# Altium PCB Copy of pcb_solder.PcbDoc (part 1 of 2)
Units mil, origin at the board's own origin, x right, y up, seen from the top; angles counter-clockwise.
Board outline 15000 x 4842.5 mil, 2 copper layers (F.Cu, B.Cu); 212 components, 120 nets, 804 pads, 0 vias.
Unrouted connection lines stored in the file: 258.
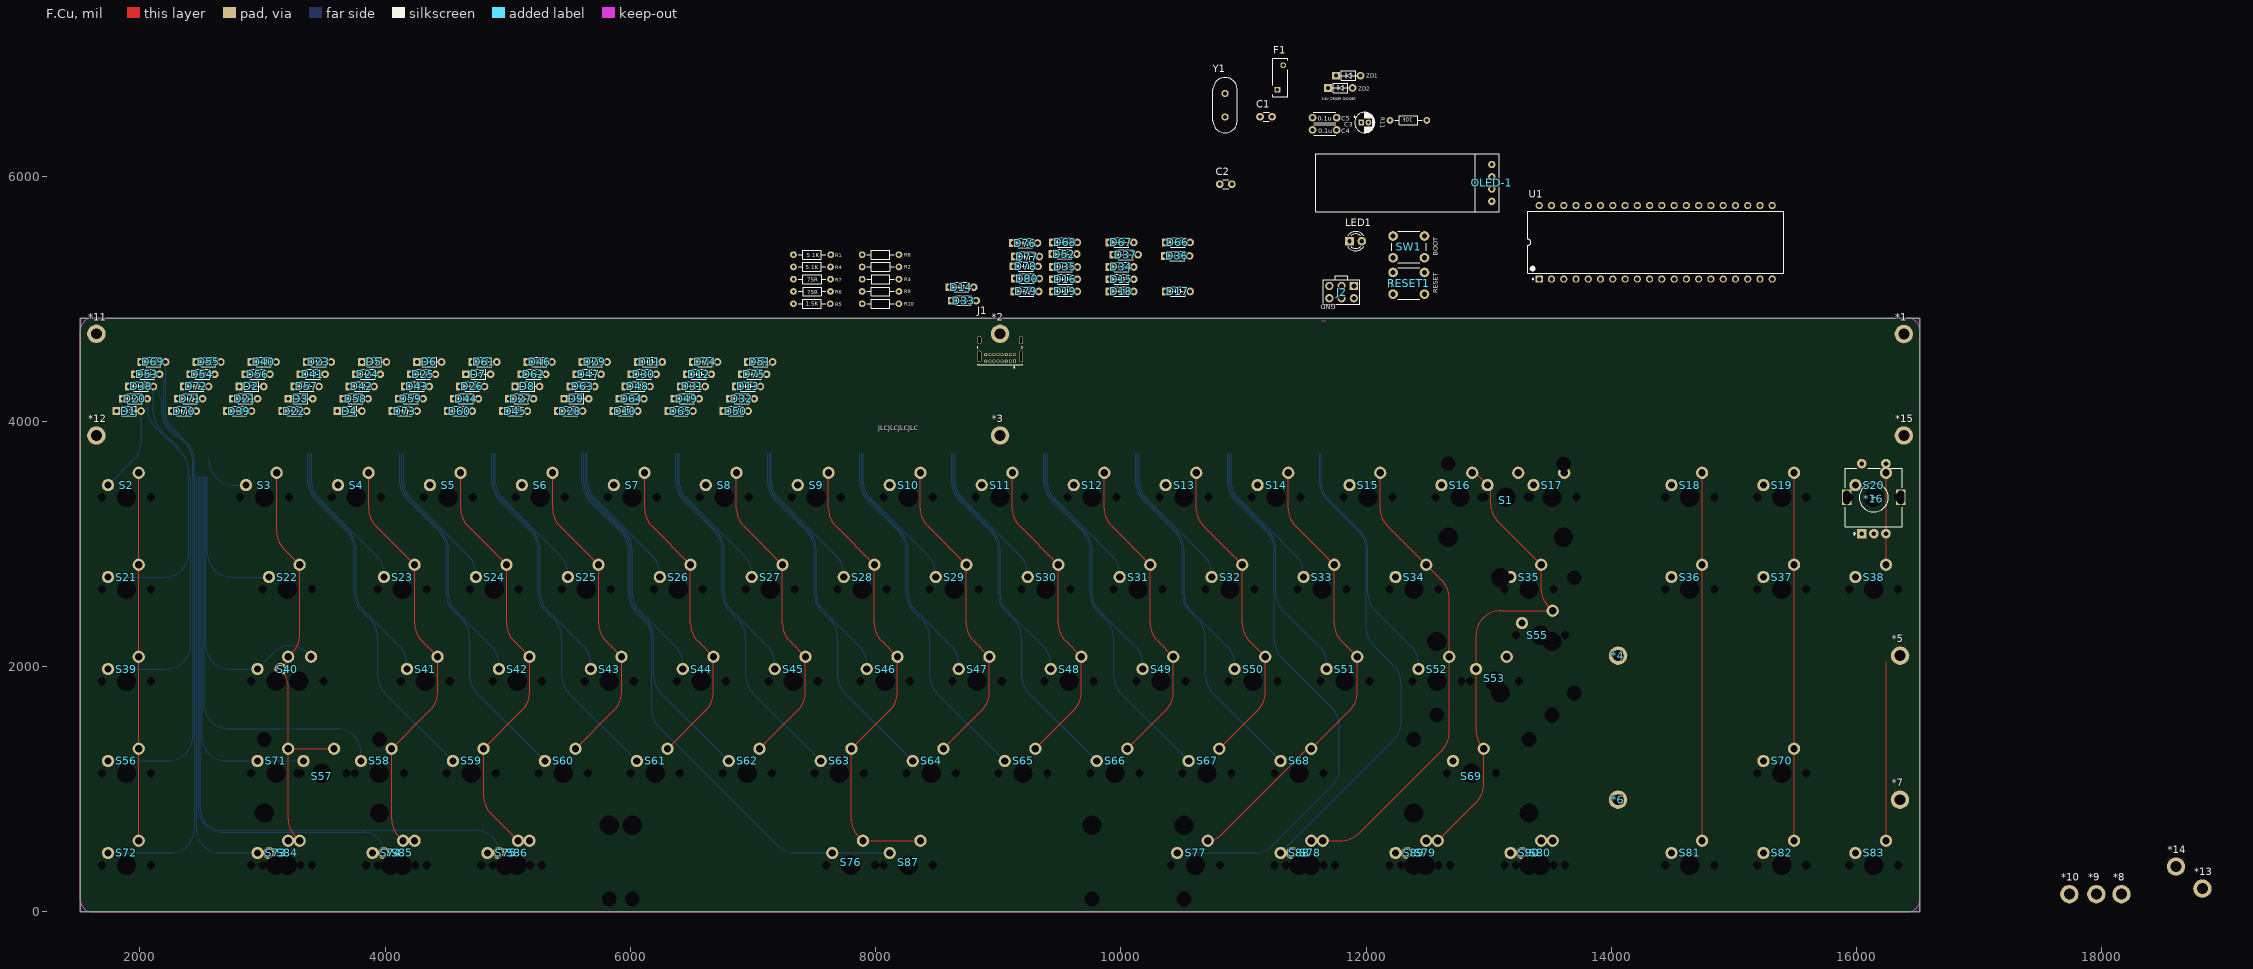
[diagram p0: F.Cu view]
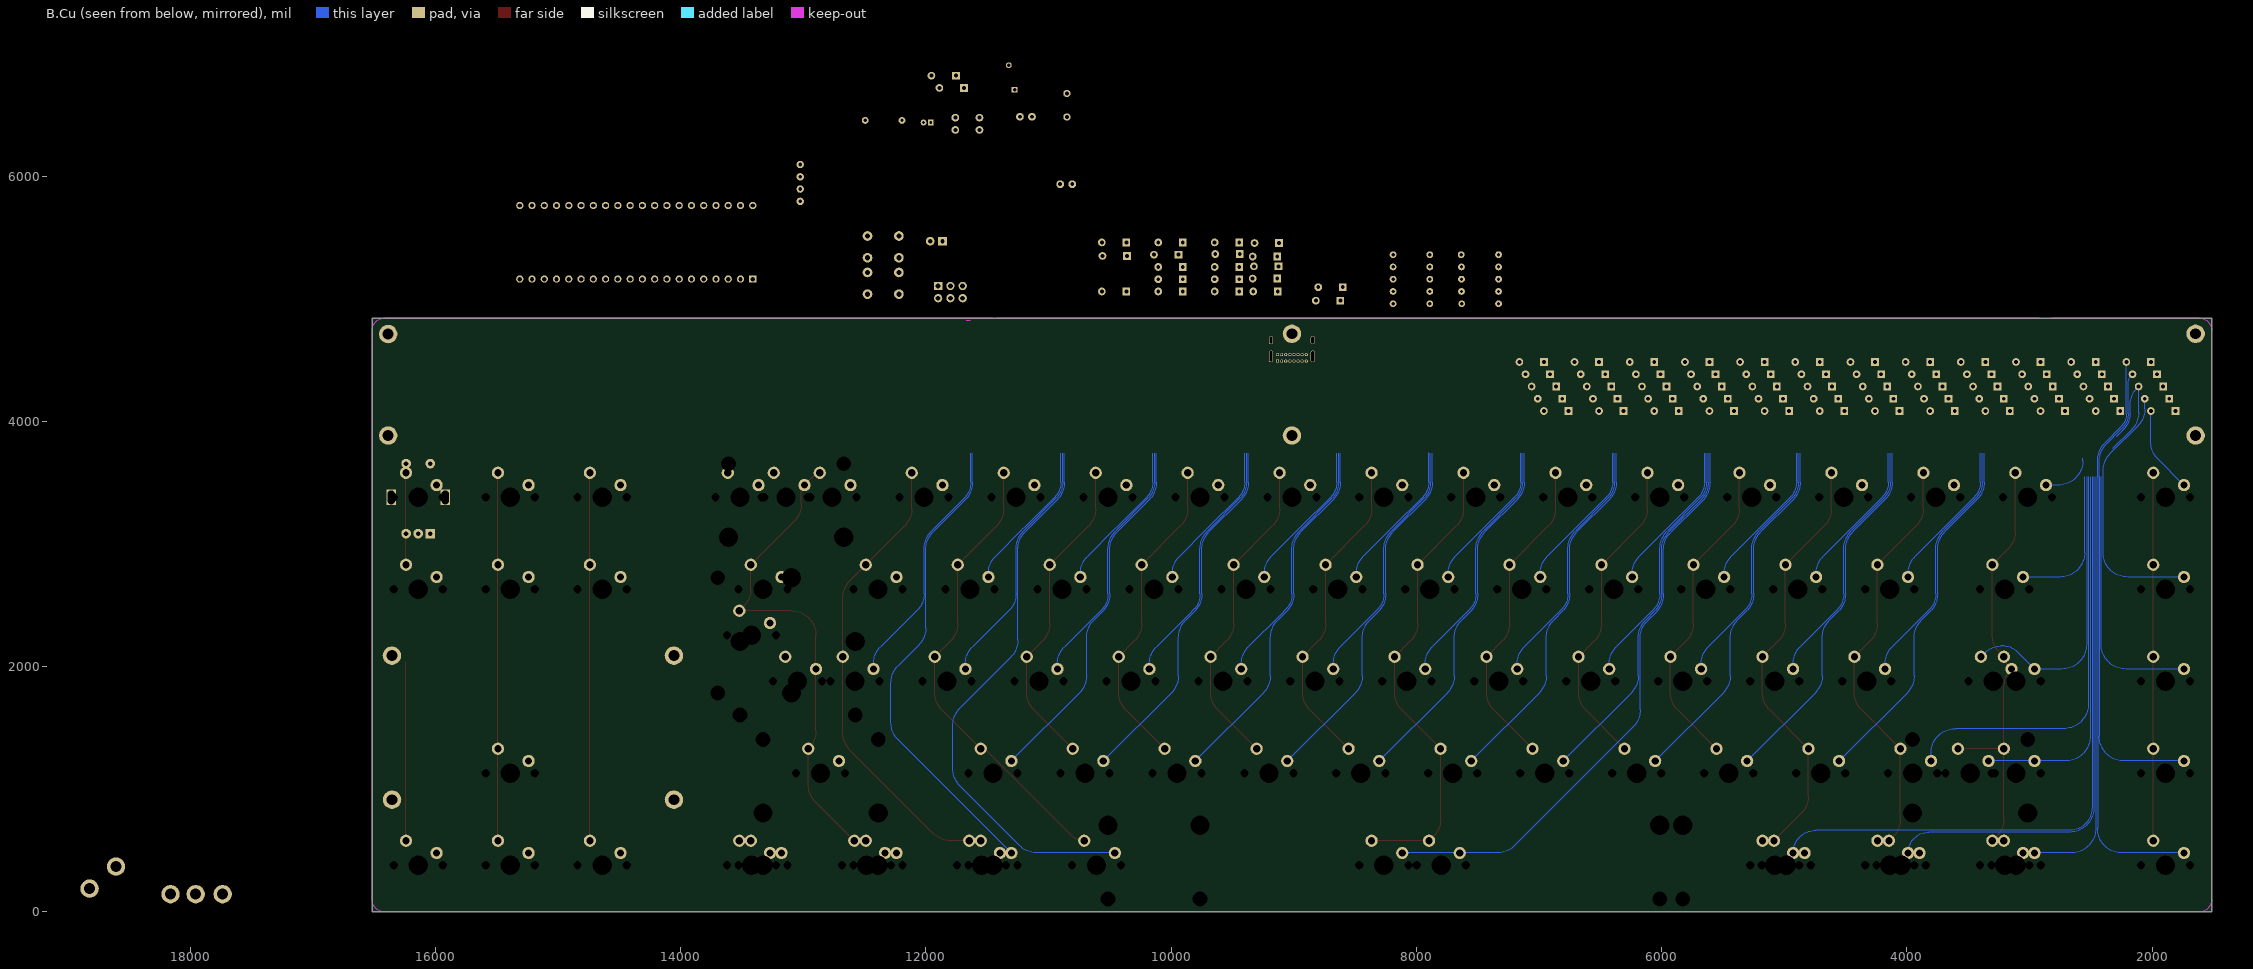
[diagram p1: B.Cu view, seen from below]

## Layer stack, top to bottom
F.Mask: solder mask 0.4, Solder Resist, Dk 3.5
F.Cu: signal copper 1.4
Dielectric 1: dielectric 12.6, FR-4, Dk 4.8
B.Cu: signal copper 1.4
B.Mask: solder mask 0.4, Solder Resist, Dk 3.5

## Board outline
16515,0 16515,3795 16515,3965 16515,4842.5 11455,4842.5 11425,4842.5 8175,4842.5 5407.5,4842.5 2820,4842.5 1515,4842.5 1515,3812.5 1515,0 2450,0 13975,0

## Design rules (kind name [scope] priority, off if disabled: settings)
BoardOutlineClearance [All] p1: gap=7.87 ignorepadtopadclearanceinfootprint=FALSE
Clearance [All] p1: gap=5 ignorepadtopadclearanceinfootprint=FALSE except(7.8: Arc-Hole Track-Hole; 9.84: SMDPad-Hole THPad-Hole Via-Hole Fill-Hole Poly-Hole Region-Hole Text-Hole)
ComponentClearance [All] p1: gap=5 collisioncheckmode=3 verticalgap=5 showdistances=TRUE
DiffPairsRouting [All] p1: maxlimit=10 minlimit=5 mostfreqgap=5 toplayer_minwidth=5 toplayer_maxwidth=1000 toplayer_prefwidth=5 bottomlayer_minwidth=5 bottomlayer_maxwidth=1000 bottomlayer_prefwidth=5 maxuncoupledlength=500
Height [All] p1: minheight=0 maxheight=71497.94 prefheight=500
HoleSize [All] p1: absolutevalues=TRUE maxlimit=248.03 minlimit=11.81 maxpercent=80.000 minpercent=20.000
HoleToHoleClearance [All] p1: gap=9.84 allowstackedmicrovias=FALSE
MinimumAnnularRing [All] p1: minimumring=3
MinimumSolderMaskSliver [All] p1: minsoldermaskwidth=0
PlaneClearance [All] p1: clearance=5
PlaneConnect PlaneConnectPowerPads [InPadClass('PowerPads')] p1: planeconnectstyle=Direct reliefexpansion=20 reliefentries=4 reliefconductorwidth=10 reliefairgap=10
PlaneConnect [All] p2: pad.planeconnectstyle=Relief pad.reliefexpansion=11.81 pad.reliefentries=4 pad.reliefconductorwidth=5 pad.reliefairgap=5 via.planeconnectstyle=Direct via.reliefexpansion=11.81 via.reliefentries=4 via.reliefconductorwidth=5 via.reliefairgap=5
PolygonConnect PolygonConnectPowerPads [All vs (InPadClass('PowerPads'))] p1: connectstyle=Direct reliefconductorwidth=10 reliefentries=4 polygonreliefangle="90 Angle" airgapwidth=10
PolygonConnect [All] p2: thpad.connectstyle=Relief thpad.reliefconductorwidth=5 thpad.reliefentries=4 thpad.polygonreliefangle="90 Angle" thpad.airgapwidth=5 smdpad.connectstyle=Relief smdpad.reliefconductorwidth=5 smdpad.reliefentries=4 smdpad.polygonreliefangle="90 Angle" smdpad.airgapwidth=5 via.connectstyle=Direct via.reliefconductorwidth=5 via.reliefentries=4 via.polygonreliefangle="90 Angle" via.airgapwidth=5
RoomDefinition sch_solder [InComponentClass('sch_solder')] p1: confinementstyle=ConfineIn formatcopy=TRUE lockcomponents=FALSE outline 16560,60 19990,60 19990,2270 16560,2270
RoutingCorners [All] p1: cornerstyle=Round minsetback=1000 maxsetback=1000
RoutingVias [All] p1: holewidth=11.81 width=23.62 viastyle="Through Hole" minholewidth=11.81 minwidth=23.62 maxholewidth=23.62 maxwidth=259.84
SilkToSilkClearance [All] p1: silktosilkclearance=0
SilkToSolderMaskClearance [IsPad] p1: minsilkscreentomaskgap=5 clearancetoexposedcopper=TRUE
SolderMaskExpansion [All] p1: expansion=2.95 istentingtop=FALSE
Width [All] p1: maxlimit=15 minlimit=5 preferedwidth=10 minimp=50.000000 maximp=50.000000 favimp=50.000000
19 further rules are at their usual default settings.

## Components (designator, comment, footprint, x,y, rotation, side; value= is the part's Value field where it differs from the comment)
*1 "Component_1" M2_Mounting_hole#1 16385,4712.5 r0 top
*2 "Component_1" M2_Mounting_hole#2 7415,4715 r0 top
*3 "Component_1" M2_Mounting_hole#2 7415,3885 r0 top
*4 "Component_1" M2_Mounting_hole#1 14055,2090 r0 top
*5 "Component_1" M2_Mounting_hole#1 16355,2090 r0 top
*6 "Component_1" M2_Mounting_hole#1 14055,915 r0 top
*7 "Component_1" M2_Mounting_hole#1 16353.5,915 r0 top
*8 "Component_1" M2_Mounting_hole#1 18160,145 r0 top
*9 "Component_1" M2_Mounting_hole#1 17955,145 r0 top
*10 "Component_1" M2_Mounting_hole#1 17735,145 r0 top
*11 "Component_1" M2_Mounting_hole#1 1645,4715 r0 top
*12 "Component_1" M2_Mounting_hole#1 1645,3885 r0 top
*13 "Component_1" M2_Mounting_hole#3 20420,190 r0 top
*14 "Component_1" M2_Mounting_hole#3 20205,370 r0 top
*15 "Component_1" M2_Mounting_hole#1 16385,3885 r0 top
*16 "Rotary_Encoder_Switch" RotaryEncoder_Alps_EC11E-Switch_Vertical_H20mm 16042.05,3084.72 r90 top
C1 "22p" C_Disc_D3.0mm_W1.6mm_P2.50mm 11135,6485 r0 top
C2 "22p" C_Disc_D3.0mm_W1.6mm_P2.50mm 10806.57,5935 r0 top
C3 "4.7u" CP_Radial_D4.0mm_P1.50mm 11960,6437.5 r0 top
C4 "0.1u" C_Disc_D4.3mm_W1.9mm_P5.00mm 11760,6377.5 r180 top
C5 "0.1u" C_Disc_D4.3mm_W1.9mm_P5.00mm 11760,6477.5 r180 top
D1 "D_Small" D_DO-35_SOD27_P5.08mm_Horizontal 1760,4085 r0 top
D2 "D_Small" D_DO-35_SOD27_P5.08mm_Horizontal 2760,4285 r0 top
D3 "D_Small" D_DO-35_SOD27_P5.08mm_Horizontal 3160,4185 r0 top
D4 "D_Small" D_DO-35_SOD27_P5.08mm_Horizontal 3560,4085 r0 top
D5 "D_Small" D_DO-35_SOD27_P5.08mm_Horizontal 3760,4485 r0 top
D6 "D_Small" D_DO-35_SOD27_P5.08mm_Horizontal 4210,4485 r0 top
D7 "D_Small" D_DO-35_SOD27_P5.08mm_Horizontal 4610,4385 r0 top
D8 "D_Small" D_DO-35_SOD27_P5.08mm_Horizontal 5010,4285 r0 top
D9 "D_Small" D_DO-35_SOD27_P5.08mm_Horizontal 5410,4185 r0 top
D10 "D_Small" D_DO-35_SOD27_P5.08mm_Horizontal 5810,4085 r0 top
D11 "D_Small" D_DO-35_SOD27_P5.08mm_Horizontal 6010,4485 r0 top
D12 "D_Small" D_DO-35_SOD27_P5.08mm_Horizontal 6410,4385 r0 top
D13 "D_Small" D_DO-35_SOD27_P5.08mm_Horizontal 6810,4285 r0 top
D14 "D_Small" D_DO-35_SOD27_P5.08mm_Horizontal 8550,5095 r0 top
D15 "D_Small" D_DO-35_SOD27_P5.08mm_Horizontal 9855,5160 r0 top
D16 "D_Small" D_DO-35_SOD27_P5.08mm_Horizontal 9395,5160 r0 top
D17 "D_Small" D_DO-35_SOD27_P5.08mm_Horizontal 10315,5060 r0 top
D18 "D_Small" D_DO-35_SOD27_P5.08mm_Horizontal 9855,5060 r0 top
D19 "D_Small" D_DO-35_SOD27_P5.08mm_Horizontal 9395,5060 r0 top
D20 "D_Small" D_DO-35_SOD27_P5.08mm_Horizontal 1810,4185 r0 top
D21 "D_Small" D_DO-35_SOD27_P5.08mm_Horizontal 2710,4185 r0 top
D22 "D_Small" D_DO-35_SOD27_P5.08mm_Horizontal 3110,4085 r0 top
D23 "D_Small" D_DO-35_SOD27_P5.08mm_Horizontal 3310,4485 r0 top
D24 "D_Small" D_DO-35_SOD27_P5.08mm_Horizontal 3710,4385 r0 top
D25 "D_Small" D_DO-35_SOD27_P5.08mm_Horizontal 4160,4385 r0 top
D26 "D_Small" D_DO-35_SOD27_P5.08mm_Horizontal 4560,4285 r0 top
D27 "D_Small" D_DO-35_SOD27_P5.08mm_Horizontal 4960,4185 r0 top
D28 "D_Small" D_DO-35_SOD27_P5.08mm_Horizontal 5360,4085 r0 top
D29 "D_Small" D_DO-35_SOD27_P5.08mm_Horizontal 5560,4485 r0 top
D30 "D_Small" D_DO-35_SOD27_P5.08mm_Horizontal 5960,4385 r0 top
D31 "D_Small" D_DO-35_SOD27_P5.08mm_Horizontal 6360,4285 r0 top
D32 "D_Small" D_DO-35_SOD27_P5.08mm_Horizontal 6760,4185 r0 top
D33 "D_Small" D_DO-35_SOD27_P5.08mm_Horizontal 8570,4985 r0 top
D34 "D_Small" D_DO-35_SOD27_P5.08mm_Horizontal 9855,5260 r0 top
D35 "D_Small" D_DO-35_SOD27_P5.08mm_Horizontal 9395,5260 r0 top
D36 "D_Small" D_DO-35_SOD27_P5.08mm_Horizontal 10310,5350 r0 top
D37 "D_Small" D_DO-35_SOD27_P5.08mm_Horizontal 9890,5360 r0 top
D38 "D_Small" D_DO-35_SOD27_P5.08mm_Horizontal 1860,4285 r0 top
D39 "D_Small" D_DO-35_SOD27_P5.08mm_Horizontal 2660,4085 r0 top
D40 "D_Small" D_DO-35_SOD27_P5.08mm_Horizontal 2860,4485 r0 top
D41 "D_Small" D_DO-35_SOD27_P5.08mm_Horizontal 3260,4385 r0 top
D42 "D_Small" D_DO-35_SOD27_P5.08mm_Horizontal 3660,4285 r0 top
D43 "D_Small" D_DO-35_SOD27_P5.08mm_Horizontal 4110,4285 r0 top
D44 "D_Small" D_DO-35_SOD27_P5.08mm_Horizontal 4510,4185 r0 top
D45 "D_Small" D_DO-35_SOD27_P5.08mm_Horizontal 4910,4085 r0 top
D46 "D_Small" D_DO-35_SOD27_P5.08mm_Horizontal 5110,4485 r0 top
D47 "D_Small" D_DO-35_SOD27_P5.08mm_Horizontal 5510,4385 r0 top
D48 "D_Small" D_DO-35_SOD27_P5.08mm_Horizontal 5910,4285 r0 top
D49 "D_Small" D_DO-35_SOD27_P5.08mm_Horizontal 6310,4185 r0 top
D50 "D_Small" D_DO-35_SOD27_P5.08mm_Horizontal 6710,4085 r0 top
D51 "D_Small" D_DO-35_SOD27_P5.08mm_Horizontal 6910,4485 r0 top
D52 "D_Small" D_DO-35_SOD27_P5.08mm_Horizontal 9390,5365 r0 top
D53 "D_Small" D_DO-35_SOD27_P5.08mm_Horizontal 1910,4385 r0 top
D54 "D_Small" D_DO-35_SOD27_P5.08mm_Horizontal 2360,4385 r0 top
D55 "D_Small" D_DO-35_SOD27_P5.08mm_Horizontal 2410,4485 r0 top
D56 "D_Small" D_DO-35_SOD27_P5.08mm_Horizontal 2810,4385 r0 top
D57 "D_Small" D_DO-35_SOD27_P5.08mm_Horizontal 3210,4285 r0 top
D58 "D_Small" D_DO-35_SOD27_P5.08mm_Horizontal 3610,4185 r0 top
D59 "D_Small" D_DO-35_SOD27_P5.08mm_Horizontal 4060,4185 r0 top
D60 "D_Small" D_DO-35_SOD27_P5.08mm_Horizontal 4460,4085 r0 top
D61 "D_Small" D_DO-35_SOD27_P5.08mm_Horizontal 4660,4485 r0 top
D62 "D_Small" D_DO-35_SOD27_P5.08mm_Horizontal 5060,4385 r0 top
D63 "D_Small" D_DO-35_SOD27_P5.08mm_Horizontal 5460,4285 r0 top
D64 "D_Small" D_DO-35_SOD27_P5.08mm_Horizontal 5860,4185 r0 top
D65 "D_Small" D_DO-35_SOD27_P5.08mm_Horizontal 6260,4085 r0 top
D66 "D_Small" D_DO-35_SOD27_P5.08mm_Horizontal 10315,5460 r0 top
D67 "D_Small" D_DO-35_SOD27_P5.08mm_Horizontal 9855,5460 r0 top
D68 "D_Small" D_DO-35_SOD27_P5.08mm_Horizontal 9395,5460 r0 top
D69 "D_Small" D_DO-35_SOD27_P5.08mm_Horizontal 1960,4485 r0 top
D70 "D_Small" D_DO-35_SOD27_P5.08mm_Horizontal 2210,4085 r0 top
D71 "D_Small" D_DO-35_SOD27_P5.08mm_Horizontal 2260,4185 r0 top
D72 "D_Small" D_DO-35_SOD27_P5.08mm_Horizontal 2310,4285 r0 top
D73 "D_Small" D_DO-35_SOD27_P5.08mm_Horizontal 4010,4085 r0 top
D74 "D_Small" D_DO-35_SOD27_P5.08mm_Horizontal 6460,4485 r0 top
D75 "D_Small" D_DO-35_SOD27_P5.08mm_Horizontal 6860,4385 r0 top
D76 "D_Small" D_DO-35_SOD27_P5.08mm_Horizontal 9070,5455 r0 top
D77 "D_Small" D_DO-35_SOD27_P5.08mm_Horizontal 9085,5345 r0 top
D78 "D_Small" D_DO-35_SOD27_P5.08mm_Horizontal 9075,5265 r0 top
D79 "D_Small" D_DO-35_SOD27_P5.08mm_Horizontal 9080,5060 r0 top
D80 "D_Small" D_DO-35_SOD27_P5.08mm_Horizontal 9085,5165 r0 top
F1 "500mA - MF-R050" FP-MF-R050-MFG 11300,6805 r90 top value=0.41-0.77Ω
J1 "USB4085-GF-A" FP-USB4085-GF-A-MFG 9015,4650 r180 top
J2 "AVR-ISP-6" AVR_ICSP_3x2 11800,5055 r180 top
LED1 "LED-CPSLK" LED_D3.0mm 11865,5470 r0 top value=LED-POWER
OLED-1 "OLED-SSD1306-128x32" ssd1306-128x32-oled 12336.02,5945 r180 top
R1 "5.1K" R_Axial_DIN0204_L3.6mm_D1.6mm_P7.62mm_Horizontal#1 7630,5360 r180 top
R2 "10K" R_Axial_DIN0204_L3.6mm_D1.6mm_P7.62mm_Horizontal#2 7890,5260 r0 top
R3 "10K" R_Axial_DIN0204_L3.6mm_D1.6mm_P7.62mm_Horizontal#2 7890,5160 r0 top
R4 "5.1K" R_Axial_DIN0204_L3.6mm_D1.6mm_P7.62mm_Horizontal#3 7330,5260 r0 top
R5 "1.5K" R_Axial_DIN0204_L3.6mm_D1.6mm_P7.62mm_Horizontal#4 7330,4960 r0 top
R6 "75R" R_Axial_DIN0204_L3.6mm_D1.6mm_P7.62mm_Horizontal#5 7630,5060 r180 top
R7 "75R" R_Axial_DIN0204_L3.6mm_D1.6mm_P7.62mm_Horizontal#5 7630,5160 r180 top
R8 "1.5K" R_Axial_DIN0204_L3.6mm_D1.6mm_P7.62mm_Horizontal#2 7890,5360 r0 top
R9 "10K" R_Axial_DIN0204_L3.6mm_D1.6mm_P7.62mm_Horizontal#2 7890,5060 r0 top
R10 "10K" R_Axial_DIN0204_L3.6mm_D1.6mm_P7.62mm_Horizontal#2 7890,4960 r0 top
R11 "10k" R_Axial_DIN0204_L3.6mm_D1.6mm_P7.62mm_Horizontal#4 12195,6455 r0 top
RESET1 "RESET" SW_PUSH_6mm 12220,5215 r0 top
S1 "SW-PB" "MX-switch - backspace" 13140.25,3381 r0 top
S2 "SW-PB" MX-switch 1890.25,3381 r0 top
S3 "SW-PB" MX-switch 3015.25,3381 r0 top
S4 "SW-PB" MX-switch 3765.25,3381 r0 top
S5 "SW-PB" MX-switch 4515.25,3381 r0 top
S6 "SW-PB" MX-switch 5265.25,3381 r0 top
S7 "SW-PB" MX-switch 6015.25,3381 r0 top
S8 "SW-PB" MX-switch 6765.25,3381 r0 top
S9 "SW-PB" MX-switch 7515.25,3381 r0 top
S10 "SW-PB" MX-switch 8265.25,3381 r0 top
S11 "SW-PB" MX-switch 9015.25,3381 r0 top
S12 "SW-PB" MX-switch 9765.25,3381 r0 top
S13 "SW-PB" MX-switch 10515.25,3381 r0 top
S14 "SW-PB" MX-switch 11265.25,3381 r0 top
S15 "SW-PB" MX-switch 12015.25,3381 r0 top
S16 "SW-PB" MX-switch 12765.25,3381 r0 top
S17 "SW-PB" MX-switch 13515.25,3381 r0 top
S18 "SW-PB" MX-switch 14640.25,3381 r0 top
S19 "SW-PB" MX-switch 15390.25,3381 r0 top
S20 "SW-PB" MX-switch 16140.25,3381 r0 top
S21 "SW-PB" MX-switch 1890.25,2631 r0 top
S22 "SW-PB" MX-switch 3202.75,2631 r0 top
S23 "SW-PB" MX-switch 4140.25,2631 r0 top
S24 "SW-PB" MX-switch 4890.25,2631 r0 top
S25 "SW-PB" MX-switch 5640.25,2631 r0 top
S26 "SW-PB" MX-switch 6390.25,2631 r0 top
S27 "SW-PB" MX-switch 7140.25,2631 r0 top
S28 "SW-PB" MX-switch 7890.25,2631 r0 top
S29 "SW-PB" MX-switch 8640.25,2631 r0 top
S30 "SW-PB" MX-switch 9390.25,2631 r0 top
S31 "SW-PB" MX-switch 10140.25,2631 r0 top
S32 "SW-PB" MX-switch 10890.25,2631 r0 top
S33 "SW-PB" MX-switch 11640.25,2631 r0 top
S34 "SW-PB" MX-switch 12390.25,2631 r0 top
S35 "SW-PB" MX-switch 13327.75,2631 r0 top
S36 "SW-PB" MX-switch 14640.25,2631 r0 top
S37 "SW-PB" MX-switch 15390.25,2631 r0 top
S38 "SW-PB" MX-switch 16140.25,2631 r0 top
S39 "SW-PB" MX-switch 1890.25,1881 r0 top
S40 "SW-PB" "MX-switch - CAPS" 3296.5,1881 r0 top
S41 "SW-PB" MX-switch 4327.75,1881 r0 top
S42 "SW-PB" MX-switch 5077.75,1881 r0 top
S43 "SW-PB" MX-switch 5827.75,1881 r0 top
S44 "SW-PB" MX-switch 6577.75,1881 r0 top
S45 "SW-PB" MX-switch 7327.75,1881 r0 top
S46 "SW-PB" MX-switch 8077.75,1881 r0 top
S47 "SW-PB" MX-switch 8827.75,1881 r0 top
S48 "SW-PB" MX-switch 9577.75,1881 r0 top
S49 "SW-PB" MX-switch 10327.75,1881 r0 top
S50 "SW-PB" MX-switch 11077.75,1881 r0 top
S51 "SW-PB" MX-switch 11827.75,1881 r0 top
S52 "SW-PB" MX-switch 12577.75,1881 r0 top
S53 "SW-PB" "MX-switch - Enter_ANSI" 13046.5,1881 r0 top
S55 "SW-PB" "MX-switch - PIPE_ISO_ENTER" 13515.25,1881 r0 top
S56 "SW-PB" MX-switch 1890.25,1131 r0 top
S57 "SW-PB" "MX-switch - 2.25U" 3484,1131 r0 top
S58 "SW-PB" MX-switch 3952.75,1131 r0 top
S59 "SW-PB" MX-switch 4702.75,1131 r0 top
S60 "SW-PB" MX-switch 5452.75,1131 r0 top
S61 "SW-PB" MX-switch 6202.75,1131 r0 top
S62 "SW-PB" MX-switch 6952.75,1131 r0 top
S63 "SW-PB" MX-switch 7702.75,1131 r0 top
S64 "SW-PB" MX-switch 8452.75,1131 r0 top
S65 "SW-PB" MX-switch 9202.75,1131 r0 top
S66 "SW-PB" MX-switch 9952.75,1131 r0 top
S67 "SW-PB" MX-switch 10702.75,1131 r0 top
S68 "SW-PB" MX-switch 11452.75,1131 r0 top
S69 "SW-PB" "MX-switch - 2.75U" 12859,1131 r0 top
S70 "SW-PB" MX-switch 15390.25,1131 r0 top
S71 "SW-PB" "MX-switch - 1.25U" 3109,1131 r0 top
S72 "SW-PB" MX-switch 1890.25,381 r0 top
S73 "SW-PB" "MX-switch - 1.25U" 3109,381 r0 top
S74 "SW-PB" "MX-switch - 1.25U" 4046.5,381 r0 top
S75 "SW-PB" "MX-switch - 1.25U" 4984,381 r0 top
S76 "SW-PB" "MX-switch - 6.25u space" 7796.5,381 r180 top
S77 "SW-PB" "MX-switch - 1.25U" 10609,381 r0 top
S78 "SW-PB" "MX-switch - 1.25U" 11546.5,381 r0 top
S79 "SW-PB" "MX-switch - 1.25U" 12484,381 r0 top
S80 "SW-PB" "MX-switch - 1.25U" 13421.5,381 r0 top
S81 "SW-PB" MX-switch 14640.25,381 r0 top
S82 "SW-PB" MX-switch 15390.25,381 r0 top
S83 "SW-PB" MX-switch 16140.25,381 r0 top
S84 "SW-PB" "MX-switch - 1.5U" 3202.75,381 r0 top
S85 "SW-PB" MX-switch 4140.25,381 r0 top
S86 "SW-PB" "MX-switch - 1.5U" 5077.75,381 r0 top
S87 "SW-PB" "MX-switch - 7u space" 8265.25,381 r180 top
S88 "SW-PB" "MX-switch - 1.5U" 11452.75,381 r0 top
S89 "SW-PB" MX-switch 12390.25,381 r0 top
S90 "SW-PB" "MX-switch - 1.5U" 13327.75,381 r0 top
SW1 "BOOT" SW_PUSH_6mm 12220,5512.17 r0 top
U1 "ATmega32A-PU" 40P6 14362,5461 r90 top
Y1 "Crystal" Crystal_HC49-4H_Vertical 10850,6482.87 r90 top
ZD1 "3.6V" D_DO-35_SOD27_P5.08MM_HORIZONTAL 11705,6820 r0 top
ZD2 "3.6V" D_DO-35_SOD27_P5.08MM_HORIZONTAL 11640,6720 r0 top

## Footprints (in the part's own frame and the unit in brackets; to place one, negate y for a bottom-side part, rotate by r counter-clockwise, add the part's x,y. Pads: shape width x height; smd on the part's side, far side on the other; paste and mask are expansions set on the pad)
40P6 [mm] "40-Pin Ceramic Dual In-Line Package (CerDIP)"
  rect 1.5x1.5 hole 0.9: 1(-7.62,24.13)
  round 1.5 hole 0.9: 2(-7.62,21.59) 3(-7.62,19.05) 4(-7.62,16.51) 5(-7.62,13.97) 6(-7.62,11.43) 7(-7.62,8.89) 8(-7.62,6.35) 9(-7.62,3.81) 10(-7.62,1.27) 11(-7.62,-1.27) 12(-7.62,-3.81) 13(-7.62,-6.35) 14(-7.62,-8.89) 15(-7.62,-11.43) 16(-7.62,-13.97) 17(-7.62,-16.51) 18(-7.62,-19.05) 19(-7.62,-21.59) 20(-7.62,-24.13) 21(7.62,-24.13) 22(7.62,-21.59) 23(7.62,-19.05) 24(7.62,-16.51) 25(7.62,-13.97) 26(7.62,-11.43) 27(7.62,-8.89) 28(7.62,-6.35) 29(7.62,-3.81) 30(7.62,-1.27) 31(7.62,1.27) 32(7.62,3.81) 33(7.62,6.35) 34(7.62,8.89) 35(7.62,11.43) 36(7.62,13.97) 37(7.62,16.51) 38(7.62,19.05) 39(7.62,21.59) 40(7.62,24.13)
  silkscreen extent -7.74,-26.5 6.45,26.5, body extent -7.05,-26.47 7.05,26.47, height 5.72
AVR_ICSP_3x2 [mm]
  rect 1.7x1.7 hole 1.016 paste-1.7 mask+0.051: 1(-2.54,-1.27)
  round 1.7 hole 1.016 paste-1.7 mask+0.051: 2(-2.54,1.27) 3(0,-1.27) 4(0,1.27) 5(2.54,-1.27) 6(2.54,1.27)
  silkscreen extent -3.81,-3.35 3.81,2.54
C_Disc_D3.0mm_W1.6mm_P2.50mm [mm]
  round 1.6 hole 0.8: 1(0,0) 2(2.5,0)
  silkscreen extent 0.62,-0.92 1.88,0.92
C_Disc_D4.3mm_W1.9mm_P5.00mm [mm]
  round 1.6 hole 0.8 paste-1.6 mask+0.051: 1(0,0) 2(5,0)
  silkscreen extent 0.23,-1.07 4.77,1.07
CP_Radial_D4.0mm_P1.50mm [mm]
  rect 1.2x1.2 hole 0.6 paste-1.2 mask+0.051: 1(0,0)
  round 1.2 hole 0.6 paste-1.2 mask+0.051: 2(1.5,0)
  silkscreen extent -1.52,-2.12 2.87,2.12
Crystal_HC49-4H_Vertical [mm]
  round 1.5 hole 0.8: 1(0,0) 2(4.88,0)
  silkscreen extent -3.28,-2.52 8.16,2.52
D_DO-35_SOD27_P5.08mm_Horizontal [mm]
  rect 1.6x1.6 hole 0.8: 1(1.27,0)
  rrect100% 1.6x1.6 hole 0.8: 2(6.35,0)
  silkscreen extent 2.07,-1 5.53,1, body extent 1.09,-0.61 6.58,0.61, height 1.37
D_DO-35_SOD27_P5.08MM_HORIZONTAL [mm]
  rect 1.6x1.6 hole 0.8: 1(1.27,0)
  rrect100% 1.6x1.6 hole 0.8: 2(6.35,0)
  silkscreen extent 2.07,-1 5.53,1, body extent 1.09,-0.61 6.58,0.61, height 1.37
FP-MF-R050-MFG [mm]
  rect 1.2x1.2 hole 0.7 paste-1000 mask+0: 1(-2.55,0.6)
  round 1.2 hole 0.7 paste-1000 mask+0: 2(2.55,-0.6)
  silkscreen extent -3.95,-1.55 3.95,1.55, body extent -4.05,-1.65 4.05,1.65, height 0.25
FP-USB4085-GF-A-MFG [mm]
  rrect100% 0.9x2.4 hole 2.1 slot 0.6 at 0 deg paste-1000 mask+0: 1(-4.325,3.045) 2(4.325,3.045)
  rrect100% 0.9x1.7 hole 1.4 slot 0.6 at 0 deg paste-1000 mask+0: 3(-4.325,-0.335) 4(4.325,-0.335)
  rect 0.65x0.65 hole 0.4 paste-1000 mask+0: A1(-2.975,4.025)
  round 0.65 hole 0.4 paste-1000 mask+0: A4(-2.125,4.025) A5(-1.275,4.025) A6(-0.425,4.025) A7(0.425,4.025) A8(1.275,4.025) A9(2.125,4.025) A12(2.975,4.025) B1(2.975,2.675) B4(2.125,2.675) B5(1.275,2.675) B6(0.425,2.675) B7(-0.425,2.675) B8(-1.275,2.675) B9(-2.125,2.675) B12(-2.975,2.675)
  silkscreen extent -4.58,0.89 4.57,5.39, body extent -4.88,-4.83 4.87,4.83, height 0.25
LED_D3.0mm [mm]
  rect 1.8x1.8 hole 0.9: 1(0,0)
  round 1.8 hole 0.9: 2(2.54,0)
  silkscreen extent -0.29,-1.99 2.94,1.99
M2_Mounting_hole#1 [mil]
  round 150 hole 89: "M2 Hole"(0,0)
M2_Mounting_hole#2 [mil]
  round 150 hole 89: "M2 Hole"(1600,0)
M2_Mounting_hole#3 [mil]
  round 150 hole 89: "M2 Hole"(-1600,0)
MX-switch [mm]
  round 2.54 hole 1.499 mask-0.5: 1(-3.81,2.54) 2(2.54,5.08)
  round 1 hole 1.702 unplated: ""(-5.08,0) ""(5.08,0)
  round 1 hole 3.988 unplated: ""(0,0)
"MX-switch - 1.5U" [mm]
  round 2.54 hole 1.499 mask-0.5: 1(-3.81,2.54) 2(2.54,5.08)
  round 1 hole 1.702 unplated: ""(-5.08,0) ""(5.08,0)
  round 1 hole 3.988 unplated: ""(0,0)
  round 1 on Mech13: ""(0,0)
"MX-switch - 1.25U" [mm]
  round 2.54 hole 1.499 mask-0.5: 1(-3.81,2.54) 2(2.54,5.08)
  round 1 hole 1.702 unplated: ""(-5.08,0) ""(5.08,0)
  round 1 hole 3.988 unplated: ""(0,0)
  round 1 on Mech13: ""(0,0)
"MX-switch - 2.25U" [mil]
  round 100 hole 59 mask-19.68: 1(-150,100) 2(100,200)
  round 60 hole 157.01 unplated: ""(-470,-325) ""(470,-325)
  round 60 hole 120 unplated: ""(-470,275) ""(470,275)
  round 39.37 hole 67.01 unplated: ""(-200,0) ""(200,0)
  round 39.37 hole 157.01 unplated: ""(0,0)
  round 39.37 on Mech13: ""(0,0)
"MX-switch - 2.75U" [mil]
  round 100 hole 59 mask-19.68: 1(-150,100) 2(100,200)
  round 60 hole 157.01 unplated: ""(-470,-325) ""(470,-325)
  round 60 hole 120 unplated: ""(-470,275) ""(470,275)
  round 39.37 hole 67.01 unplated: ""(-200,0) ""(200,0)
  round 39.37 hole 157.01 unplated: ""(0,0)
  round 39.37 on Mech13: ""(0,0)
"MX-switch - 6.25u space" [mil]
  round 100 hole 59 mask-19.68: 1(150,-100) 2(-100,-200)
  round 60 hole 157.01 unplated: ""(-1968.5,-325) ""(1968.5,-325)
  round 60 hole 120 unplated: ""(-1968.5,275) ""(1968.5,275)
  round 39.37 hole 67.01 unplated: ""(-200,0) ""(200,0)
  round 39.37 hole 157.01 unplated: ""(0,0)
  round 39.37 on Mech13: ""(0,0)
"MX-switch - 7u space" [mil]
  round 100 hole 59 mask-19.68: 1(150,-100) 2(-100,-200)
  round 60 hole 157.01 unplated: ""(-2250,-325) ""(2250,-325)
  round 60 hole 120 unplated: ""(-2250,275) ""(2250,275)
  round 39.37 hole 67.01 unplated: ""(-200,0) ""(200,0)
  round 39.37 hole 157.01 unplated: ""(0,0)
  round 39.37 on Mech13: ""(0,0)
"MX-switch - backspace" [mil]
  round 100 hole 59 mask-19.68: 1(100,200) 2(-150,100)
  round 60 hole 157.01 unplated: ""(-470,-325) ""(470,-325)
  round 60 hole 120 unplated: ""(-470,275) ""(470,275)
  round 39.37 hole 67.01 unplated: ""(-200,0) ""(200,0)
  round 39.37 hole 157.01 unplated: ""(0,0)
  round 39.37 on Mech13: ""(0,0)
"MX-switch - CAPS" [mm]
  round 2.54 hole 1.499 mask-0.5: 1(-8.572,2.54) 1(2.54,5.08) 2(-3.81,2.54) 2(-2.222,5.08)
  round 1 hole 1.702 unplated: ""(-9.842,0) ""(5.08,0)
  round 1 hole 3.988 unplated: ""(-4.763,0) ""(0,0)
  round 1 on Mech13: ""(-4.763,0) ""(0,0)
"MX-switch - Enter_ANSI" [mil]
  round 100 hole 59 mask-19.68: 1(100,200) 2(-150,100)
  round 60 hole 120 unplated: ""(-470,-275) ""(470,-275)
  round 60 hole 157.01 unplated: ""(-470,325) ""(470,325)
  round 39.37 on Mech13: ""(-468.75,0) ""(-468.75,0) ""(0,0) ""(0,0)
  round 39.37 hole 67.01 unplated: ""(-200,0) ""(200,0)
  round 39.37 hole 157.01 unplated: ""(0,0)
"MX-switch - PIPE_ISO_ENTER" [mil]
  round 100 hole 59 mask-19.68: 1(-243.75,475) 2(6.25,575)
  round 60 hole 157.01 unplated: ""(-418.75,-95) ""(-418.75,845)
  round 39.37 hole 67.01 unplated: ""(-293.75,375) ""(106.25,375)
  round 39.37 on Mech13: ""(-187.5,750) ""(-93.75,375) ""(-93.75,375)
  round 39.37 hole 157.01 unplated: ""(-93.75,375)
  round 60 hole 120 unplated: ""(181.25,-95) ""(181.25,845)
R_Axial_DIN0204_L3.6mm_D1.6mm_P7.62mm_Horizontal#1 [mm]
  round 1.4 hole 0.7 paste-1.4 mask+0.051: 1(-0.127,0)
  rrect100% 1.4x1.4 hole 0.7 paste-1.4 mask+0.051: 2(7.62,0)
  silkscreen extent 0.94,-0.92 6.68,0.92
R_Axial_DIN0204_L3.6mm_D1.6mm_P7.62mm_Horizontal#2 [mm]
  round 1.4 hole 0.7: 1(0,0)
  rrect100% 1.4x1.4 hole 0.7: 2(7.62,0)
  silkscreen extent 0.94,-0.92 6.68,0.92
R_Axial_DIN0204_L3.6mm_D1.6mm_P7.62mm_Horizontal#3 [mm]
  round 1.4 hole 0.7 paste-1.4 mask+0.051: 1(0,0)
  rrect100% 1.4x1.4 hole 0.7 paste-1.4 mask+0.051: 2(7.683,0)
  silkscreen extent 0.94,-0.92 6.68,0.92
R_Axial_DIN0204_L3.6mm_D1.6mm_P7.62mm_Horizontal#4 [mm]
  round 1.4 hole 0.7 paste-1.4 mask+0.051: 1(0,0)
  rrect100% 1.4x1.4 hole 0.7 paste-1.4 mask+0.051: 2(7.62,0)
  silkscreen extent 0.94,-0.92 6.68,0.92
R_Axial_DIN0204_L3.6mm_D1.6mm_P7.62mm_Horizontal#5 [mm]
  round 1.4 hole 0.7 paste-1.4 mask+0.051: 1(-0.051,0)
  rrect100% 1.4x1.4 hole 0.7 paste-1.4 mask+0.051: 2(7.62,0)
  silkscreen extent 0.94,-0.92 6.68,0.92
RotaryEncoder_Alps_EC11E-Switch_Vertical_H20mm [mm]
  rect 2x2 hole 1: A(0,0)
  round 2 hole 1: B(0,-5) C(0,-2.5) S1(14.5,-5) S2(14.5,0)
  rect 3.2x2 hole 1.5 slot 2.8 at 0 deg: MP(7.5,-8.1) MP(7.5,3.1)
  silkscreen extent -0.3,-8.4 13.6,3.4
ssd1306-128x32-oled [mil]
  round 60 hole 30 paste-60 mask+2.01: 1(-688.98,150) 2(-688.98,50) 3(-688.98,-50) 4(-688.98,-150)
  silkscreen extent -748,-236 748,236
SW_PUSH_6mm [mm]
  round 2 hole 1.1 paste-2 mask+0.051: 1(0,0) 1(6.5,0) 2(0,-4.5) 2(6.5,-4.5)
  silkscreen extent -0.25,-5.5 6.75,1

## Part data
C1 C2 C4 C5: library part C_Small
C3: library part CP1_Small
F1: library part CMP-07400-000037-1, "PTC RESET FUSE 60V 500MA RADIAL", Ambient Temperature Range High=+85°C, Ambient Temperature Range Low=-40°C, Current Rating=40A, Hold Current=0.5A, Manufacturer=Bourns, Manufacturer Part Number=MF-R050, Resistance=0.41-0.77Ω, Temperature="-40°C to +85°C", Trip Current=1A, Voltage Rating=60V, Automotive=No, Category=Fuse, ComponentLink2Description=Datasheet, ComponentLink2URL=https://upverter.com/datasheet/a1b715b2a3574ae967878e49fe70c2811aecae4b.pdf, Device Class L1="Circuit Protection", Device Class L2="PTC Resettable Fuses", Device Class L3=unset, Digikey Description="PTC RESET FUSE 60V 500MA RADIAL", Height=13.7mm, Lead Free=Yes, Mouser Description="PTC Resettable Fuse 0.5A(hold) 1A(trip) 60V 40A 0.75W 4s 0.41Ohm Radial 7.9 X 3.1mm Bulk", Octopart=https://octopart.com/mf-r050-bourns-19418, Package=MF-R050, RoHS=TRUE, Temperature Range High=+85°C, Temperature Range Low=-40°C, Trip Time=4s
J1: library part CMP-196119-000001-1, "CONN RCPT USB2.0 TYPEC 16POS", Current Rating=4.25A, Manufacturer="Global Connector Technology", Package=0, Temperature="-40°C to +85°C", Temperature Range High=+85°C, Temperature Range Low=-40°C, Voltage Rating=20V, Automotive=No, Category=Conn, ComponentLink2Description=Datasheet, ComponentLink2URL=https://gct.co/files/drawings/usb4085.pdf, Conn Orientation="Right Angle", Contact Material=Gold,Nickel, Device Class L1=Connectors, Device Class L2="USB Connectors", Device Class L3=unset, Digikey Description="CONN RCPT USB2.0 TYPEC 16POS", Height=3.66mm, Is Female=yes, Lead Free=Yes, Manufacturer Part Number=USB4085-GF-A, Number Of Contacts=16, Octopart=https://octopart.com/usb4085-gf-a-global+connector+technology-94773699, Pitch=0.85mm, RoHS=TRUE, Shielding=true, Usb Standard="USB 2.0"
J2: library part AVR-ISP-6-Connector
LED1: library part LED
OLED-1: library part OLED
R1 R2 R3 R4 R5 R6 R7 R8 R9 R10 R11: library part R_Small
RESET1 SW1: library part SW_PUSH
S1 S2 S3 S4 S5 S6 S7 S8 S9 S10 S11 S12 S13 S14 S15 S16 S17 S18 S19 S20 S21 S22 S23 S24 S25 S26 S27 S28 S29 S30 S31 S32 S33 S34 S35 S36 S37 S38 S39 S40 S41 S42 S43 S44 S45 S46 S47 S48 S49 S50 S51 S52 S53 S55 S56 S57 S58 S59 S60 S61 S62 S63 S64 S65 S66 S67 S68 S69 S70 S71 S72 S73 S74 S75 S76 S77 S78 S79 S80 S81 S82 S83 S84 S85 S86 S87 S88 S89 S90: "Switch", LatestRevisionDate=17-Jul-2002, LatestRevisionNote="Re-released for DXP Platform.", PackageDescription="Switch; 2 Leads", PackageReference=SPST-2, Published=24-Mar-1999, Publisher="Altium Limited"
U1: library part CMP-0095-00028-2, "8-bit AVR Microcontroller, 2.7-5.5V, 16MHz, 32KB Flash, 1KB EEPROM, 2KB SRAM, 40-pin PDIP, Industrial Grade (-40°C to 85°C)", Code_JEDEC=MS-011-AC, ComponentLink1Description="Manufacturer URL", ComponentLink1URL=http://www.atmel.com/, ComponentLink2Description="ATmega32A Datasheet", ComponentLink2URL=http://www.atmel.com/dyn/resources/prod_documents/doc8155.pdf, ComponentLink3Description="ATmega32A Summary", ComponentLink3URL=http://www.atmel.com/dyn/resources/prod_documents/8155S.pdf, DatasheetVersion="revC, Feb-2011", PackageDescription="40-lead (0.600\"/15.24mm Wide) Plastic Dual Inline Package (PDIP)", PackageReference=40P6, PackageVersion="revB, Sep-2001", RevisionNote="DatasheetVersion updated. URLs added."
ZD1 ZD2: library part D_Zener_Small

## Nets (pads, with @x,y where several pads share a name; then routed paths per layer and width w, separated by ;. In a path a pad name is that pad's centre, name@x,y a point inside that pad or via, vN(x,y) a via of type N, cw(c..) or ccw(c..) an arc to the next point about the centre after c; other vN are vias at no path point)
+5V: C3.1 C4.1 C5.1 F1.2 J2.2 LED1.2 OLED-1.3 R2.2 R3.2 R5.1 R9.1 R10.1 R11.1 U1.10 U1.30
BOOT: SW1.1 U1.18
CC1: J1.A5 R1.2
CC2: J1.B5 R4.1
COL0: S2.2 S21.2 S39.2 S56.2 S72.2 U1.1 | length 3000
  F.Cu w10: S72.2@1990.25,581 S56.2@1990.25,1331 S39.2@1990.25,2081 S21.2@1990.25,2831 S2.2@1990.25,3581
COL1: S3.2 S22.2 S40.2 S57.2 S71.2 S73.2 S84.2 U1.2 | length 3637.8
  F.Cu w10: S3.2@3115.25,3581 3115.25,3101.34 ccw(c3315.25,3101.34) 3173.83,2959.92 S22.2@3302.75,2831 3302.75,2257.59 cw(c3102.75,2257.59) 3244.17,2116.17 S40.2@3209,2081 cw(c3118.47,2081) 3182.48,2016.98 S40.2@3146.5,1981 3150.42,1977.08 cw(c3009,1835.66) 3182.43,1935.27 3182.73,1934.86 cw(c3109,1881) 3198.1,1900.95 ccw(c3207.84,1903.2) 3198.35,1900.04 cw(c3009,1835.66) 3205.53,1872.73 cw(c3195.7,1870.92) 3205.65,1871.94 ccw(c3296.5,1881) 3207.27,1861.66 cw(c3197.49,1859.56) 3207.41,1860.84 cw(c3009,1835.66) 3209,1835.66 S71.2@3209,1331 ; S73.2@3209,581 S84.2@3302.75,581 3267.58,616.17 cw(c3409,757.59) 3209,757.59 S71.2@3209,1331 ; S57.2@3584,1331 S71.2@3209,1331
COL2: S4.2 S23.2 S41.2 S58.2 S74.2 S85.2 U1.3 | length 3486.5
  F.Cu w10: S4.2@3865.25,3581 3865.25,3288.84 ccw(c4065.25,3288.84) 3923.83,3147.42 S23.2@4240.25,2831 4240.25,2351.34 ccw(c4440.25,2351.34) 4298.83,2209.92 S41.2@4427.75,2081 4427.75,1788.84 cw(c4227.75,1788.84) 4369.17,1647.42 S58.2@4052.75,1331 4052.75,757.59 ccw(c4252.75,757.59) 4111.33,616.17 S74.2@4146.5,581 S85.2@4240.25,581
COL3: S5.2 S24.2 S42.2 S59.2 S75.2 S86.2 U1.4 | length 3564.1
  F.Cu w10: S5.2@4615.25,3581 4615.25,3288.84 ccw(c4815.25,3288.84) 4673.83,3147.42 S24.2@4990.25,2831 4990.25,2351.34 ccw(c5190.25,2351.34) 5048.83,2209.92 S42.2@5177.75,2081 5177.75,1788.84 cw(c4977.75,1788.84) 5119.17,1647.42 S59.2@4802.75,1331 4802.75,945.09 ccw(c5002.75,945.09) 4861.33,803.67 S75.2@5084,581 S86.2@5177.75,581
COL4: S6.2 S25.2 S43.2 S60.2 U1.5 | length 2612.5
  F.Cu w10: S6.2@5365.25,3581 5365.25,3288.84 ccw(c5565.25,3288.84) 5423.83,3147.42 S25.2@5740.25,2831 5740.25,2351.34 ccw(c5940.25,2351.34) 5798.83,2209.92 S43.2@5927.75,2081 5927.75,1788.84 cw(c5727.75,1788.84) 5869.17,1647.42 S60.2@5552.75,1331
COL5: S7.2 S26.2 S44.2 S61.2 U1.14 | length 2612.5
  F.Cu w10: S7.2@6115.25,3581 6115.25,3288.84 ccw(c6315.25,3288.84) 6173.83,3147.42 S26.2@6490.25,2831 6490.25,2351.34 ccw(c6690.25,2351.34) 6548.83,2209.92 S44.2@6677.75,2081 6677.75,1788.84 cw(c6477.75,1788.84) 6619.17,1647.42 S61.2@6302.75,1331